# EAGLE board display_hora (EAGLE 5.02)
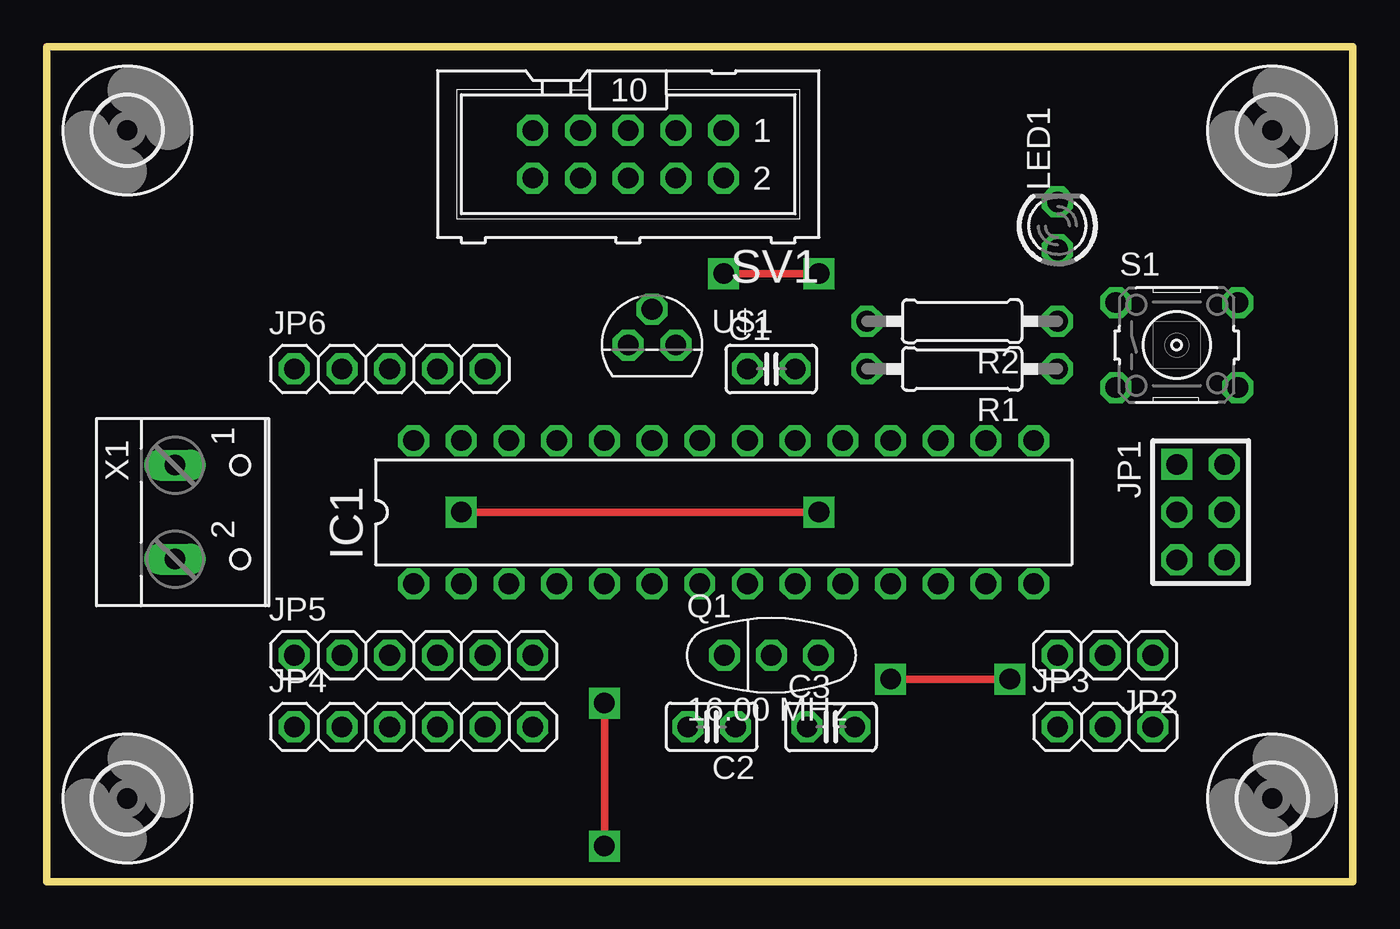
[diagram p0: board, top side]
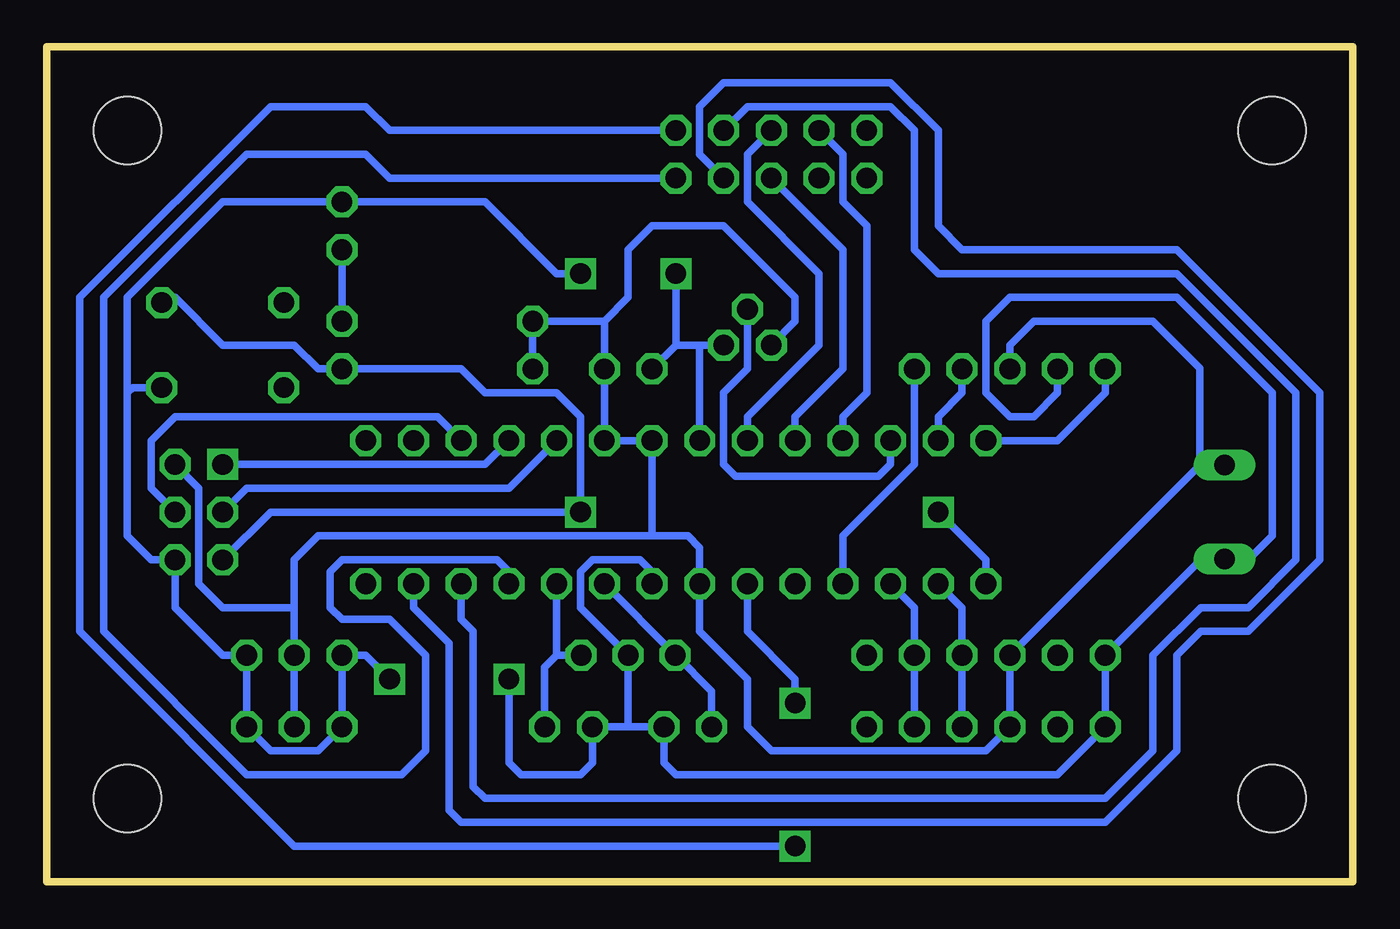
[diagram p1: board, bottom side, seen from below]

Size 69.52 x 44.44 mm. Coordinates in mm from the lower left corner, seen from the top.
Outline: 0,0 69.52,0 69.52,44.44 0,44.44 0,0
Copper layers (1*16): Top 0.035mm / dielectric 1.5mm / Bottom 0.035mm
Design rules "default": minimum track width 10mil, minimum drill 24mil, track to track 8mil, track to pad 8mil, pad to pad 8mil, via to via 8mil, smd to smd 8mil, copper to edge 40mil, drill to drill 8mil, minimum pad ring 10mil, minimum via ring 8mil, stop-mask expansion 4mil, vias tented up to drill 0mil, thermal gap 10mil

## Footprints (pad centres in the part's own frame; a part is rotated, then mirrored left to right if it is on the bottom)
C025-025X050 = drill 1.1 octagon: 1 -1.27,0; 2 1.27,0
DIL28-3 = drill 1.1 octagon: 1 -16.51,-3.81; 2 -13.97,-3.81; 3 -11.43,-3.81; 4 -8.89,-3.81; 5 -6.35,-3.81; 6 -3.81,-3.81; 7 -1.27,-3.81; 8 1.27,-3.81; 9 3.81,-3.81; 10 6.35,-3.81; 11 8.89,-3.81; 12 11.43,-3.81; 13 13.97,-3.81; 14 16.51,-3.81; 15 16.51,3.81; 16 13.97,3.81; 17 11.43,3.81; 18 8.89,3.81; 19 6.35,3.81; 20 3.81,3.81; 21 1.27,3.81; 22 -1.27,3.81; 23 -3.81,3.81; 24 -6.35,3.81; 25 -8.89,3.81; 26 -11.43,3.81; 27 -13.97,3.81; 28 -16.51,3.81
AVR-ISP-6 = drill 1.1 square: 1 -2.54,-1.27 | drill 1.1 octagon: 2 -2.54,1.27; 3 0,-1.27; 4 0,1.27; 5 2.54,-1.27; 6 2.54,1.27
1X03 = drill 1.1 octagon: 1 -2.54,0; 2 0,0; 3 2.54,0
1X06 = drill 1.1 octagon: 1 -6.35,0; 2 -3.81,0; 3 -1.27,0; 4 1.27,0; 5 3.81,0; 6 6.35,0
1X05 = drill 1.1 octagon: 1 -5.08,0; 2 -2.54,0; 3 0,0; 4 2.54,0; 5 5.08,0
LED3MM = drill 1.1 octagon: A -1.27,0; K 1.27,0
CSTLS_G9 = drill 1.1 octagon: 1 -2.5,0; 2 0,0; 3 2.5,0
0207/10 = drill 1.1 octagon: 1 -5.08,0; 2 5.08,0
B3F-10XX = drill 1.1 octagon: 1 -3.251,2.261; 2 3.251,2.261; 3 -3.251,-2.261; 4 3.251,-2.261
ML10 = drill 1.1 octagon: 1 -5.08,-1.27; 2 -5.08,1.27; 3 -2.54,-1.27; 4 -2.54,1.27; 5 0,-1.27; 6 0,1.27; 7 2.54,-1.27; 8 2.54,1.27; 9 5.08,-1.27; 10 5.08,1.27
TO92 = drill 1.1 octagon: 1 1.27,0; 2 0,1.905; 3 -1.27,0
3,6 = hole 3.6: 0,0
W237-102 = drill 1.1 long: 1 -2.5,-1.27; 2 2.5,-1.27

## Placement (x,y rotation side)
C1  0.1uF  [C025-025X050]  38.57,27.3 0 top
C2  0.1uF  [C025-025X050]  35.4,8.25 180 top
C3  0.1uF  [C025-025X050]  41.75,8.25 0 top
IC1  MEGA8-P  [DIL28-3]  36.03,19.68 0 top
JP1  AVR-ISP-6  [AVR-ISP-6]  61.43,19.68 270 top
JP2  [1X03]  56.35,12.06 180 top
JP3  [1X03]  56.35,8.25 0 top
JP4  [1X06]  19.52,8.25 0 top
JP5  [1X06]  19.52,12.06 0 top
JP6  [1X05]  18.25,27.3 0 top
LED1  [LED3MM]  53.81,34.92 90 top
Q1  16.00 MHz  [CSTLS_G9]  38.57,12.06 0 top
R1  10 K  [0207/10]  48.73,27.3 180 top
R2  1 K  [0207/10]  48.73,29.84 180 top
S1  [B3F-10XX]  60.16,28.57 0 top
SV1  [ML10]  30.95,38.73 180 top
U$1  LM35  [TO92]  32.22,28.57 0 top
U$2  [3,6]  4.28,4.44 0 top
U$3  [3,6]  4.28,40 0 top
U$4  [3,6]  65.24,40 0 top
U$5  [3,6]  65.24,4.44 0 top
X1  [W237-102]  8.09,19.68 270 top

## Library data of the parts
C1-C3 IC1 JP1 JP4 JP5 LED1 Q1 R1 S1 = ccard
JP2 JP3 JP6 R2 SV1 U$1-U$5 X1 = display

## Nets
#RST: IC1.1 JP1.5 R1.1 S1.2
+5V: C1.2 IC1.7 IC1.20 IC1.21 JP1.2 JP2.2 JP3.2 JP4.3 JP5.3 JP6.3 R1.2 R2.2 U$1.3 X1.1
CLOCK: IC1.24 SV1.6
DATA: IC1.23 SV1.5
GND: C1.1 C2.1 C3.1 IC1.8 IC1.22 JP1.6 JP2.1 JP2.3 JP3.1 JP3.3 JP4.1 JP5.1 JP6.2 LED1.K Q1.2 S1.4 U$1.1 X1.2
LATCH: IC1.25 SV1.7
N$1: IC1.28 JP6.1
N$2: IC1.19 JP1.3
N$3: IC1.18 JP1.1
N$4: IC1.17 JP1.4
N$5: C3.2 IC1.10 Q1.3
N$6: C2.2 IC1.9 Q1.1
N$7: IC1.27 JP6.4
N$8: IC1.4 JP6.5
N$9: IC1.26 U$1.2
N$10: IC1.12 SV1.3
N$11: IC1.11 SV1.2
N$12: IC1.6 SV1.1
N$13: IC1.13 SV1.4
N$16: LED1.A R2.1
RXD: IC1.2 JP4.4 JP5.4
TXD: IC1.3 JP4.5 JP5.5

## Tracks (layer width: path | path; a pad name or v marks a point on that pad's centre or on a via)
#RST  (via drill 1.1)
  Top 0.406: v22.06,19.68 v41.11,19.68
  Bottom 0.406: JP1.5 57.62,19.68 v41.11,19.68 41.11,24.76 42.38,26.03 46.19,26.03 47.46,27.3 55.08,27.3 | 55.08,27.3 R1.1 | 55.08,27.3 56.35,28.57 60.16,28.57 62.7,31.11 63.34,30.47 63.41,30.55 S1.2 | IC1.1 19.52,17.14 v22.06,19.68
+5V
  Bottom 0.406: JP3.2 JP2.2 56.35,14.6 | JP6.3 18.25,28.57 16.98,29.84 10.63,29.84 8.13,27.34 8.13,22.18 | 8.13,22.18 X1.1 | 8.13,22.18 JP5.3 JP4.3 19.52,6.98 30.95,6.98 32.22,8.25 32.22,10.79 34.76,13.33 IC1.7 34.76,17.77 35.4,18.41 37.3,18.41 | R1.2 R2.2 39.84,29.84 | JP1.2 61.43,20.95 61.43,15.87 60.16,14.6 56.35,14.6 | 39.84,29.84 C1.2 IC1.20 IC1.21 37.3,18.41 | U$1.3 29.68,29.84 29.68,31.11 33.49,34.92 37.3,34.92 38.57,33.65 38.57,31.11 39.84,29.84 | 37.3,18.41 55.08,18.41 56.35,17.14 56.35,14.6
CLOCK
  Bottom 0.406: IC1.24 29.68,24.76 27.14,27.3 27.14,33.65 SV1.6
DATA
  Bottom 0.406: IC1.23 32.22,24.76 28.41,28.57 28.41,32.38 32.22,36.19 32.22,38.73 SV1.5
GND  (via drill 1.1)
  Top 0.406: v44.92,10.79 v51.27,10.79 | v41.11,32.38 v36.03,32.38
  Bottom 0.406: 36.03,28.57 C1.1 | 8.09,17.14 JP5.1 JP4.1 15.71,5.71 36.03,5.71 36.67,6.35 C2.1 38.57,8.25 | 8.09,17.14 X1.2 | 38.57,8.25 C3.1 40.48,6.35 41.11,5.71 44.29,5.71 44.92,6.35 v44.92,10.79 | 38.57,8.25 Q1.2 41.11,14.6 41.11,16.5 40.48,17.14 37.94,17.14 37.3,16.5 IC1.8 | JP6.2 15.71,26.03 16.98,24.76 18.25,24.76 19.52,26.03 19.52,29.84 18.25,31.11 9.36,31.11 4.28,26.03 4.28,18.41 5.55,17.14 8.09,17.14 | 65.24,27.3 65.24,31.11 60.16,36.19 LED1.K 46.19,36.19 42.38,32.38 v41.11,32.38 | 65.24,27.3 65.24,26.03 64.96,26.31 S1.4 | 65.24,27.3 65.24,18.41 63.97,17.14 JP1.6 62.7,14.6 60.16,12.06 JP2.1 JP3.3 57.62,6.98 55.08,6.98 JP3.1 JP2.3 52.54,12.06 v51.27,10.79 | 34.76,28.57 U$1.1 | 34.76,28.57 IC1.22 | 36.03,28.57 34.76,28.57 | v36.03,32.38 36.03,28.57
LATCH
  Bottom 0.406: SV1.7 27.14,38.73 27.14,36.19 25.87,34.92 25.87,26.03 27.14,24.76 IC1.25
N$1
  Bottom 0.406: IC1.28 15.71,23.49 13.17,26.03 JP6.1
N$2
  Bottom 0.406: IC1.19 44.92,20.95 58.89,20.95 JP1.3
N$3
  Bottom 0.406: IC1.18 46.19,22.22 JP1.1
N$4
  Bottom 0.406: IC1.17 48.73,24.76 62.7,24.76 63.97,23.49 63.97,20.95 JP1.4
N$5
  Bottom 0.406: 42.38,12.06 IC1.10 | 42.38,12.06 43.02,11.43 C3.2 | 42.38,12.06 Q1.3
N$6
  Bottom 0.406: C2.2 34.12,10.15 36.03,12.06 Q1.1 36.07,12.1 IC1.9
N$7
  Bottom 0.406: IC1.27 22.06,24.76 20.79,26.03 JP6.4
N$8
  Bottom 0.406: JP6.5 23.33,22.22 27.14,18.41 IC1.4
N$9
  Bottom 0.406: U$1.2 32.22,27.3 33.49,26.03 33.49,22.22 32.86,21.59 25.23,21.59 24.6,22.22 IC1.26
N$10
  Bottom 0.406: SV1.3 32.22,41.27 24.6,41.27 23.33,40 23.33,33.65 22.06,32.38 9.36,32.38 3.01,26.03 3.01,17.14 5.55,14.6 8.09,14.6 10.63,12.06 10.63,6.98 13.17,4.44 46.19,4.44 46.83,5.08 46.83,13.33 47.46,13.96 IC1.12
N$11
  Bottom 0.406: SV1.2 51.27,37.46 52.54,38.73 58.89,38.73 66.51,31.11 66.51,13.33 58.89,5.71 50.64,5.71 49.37,6.98 49.37,12.06 51.27,13.96 53.81,13.96 54.45,14.6 54.45,16.5 53.81,17.14 45.55,17.14 44.92,16.5 IC1.11
N$12  (via drill 1.1)
  Top 0.406: v29.68,1.9 v29.68,9.52
  Bottom 0.406: SV1.1 51.27,40 52.54,41.27 57.62,41.27 67.78,31.11 67.78,13.33 56.35,1.9 v29.68,1.9 | v29.68,9.52 29.68,10.79 32.22,13.33 IC1.6
N$13
  Bottom 0.406: SV1.4 34.76,38.73 34.76,41.27 33.49,42.54 24.6,42.54 22.06,40 22.06,34.92 20.79,33.65 9.36,33.65 1.74,26.03 1.74,17.14 5.55,13.33 8.09,13.33 9.36,12.06 9.36,6.98 13.17,3.17 47.46,3.17 48.1,3.8 48.1,12.7 50,14.6 IC1.13
N$16
  Bottom 0.406: R2.1 LED1.A
RXD
  Bottom 0.406: IC1.2 20.79,14.6 JP5.4 JP4.4
TXD
  Bottom 0.406: IC1.3 23.33,14.6 JP5.5 JP4.5